# Altium PCB PCB1.PcbDoc
Units mil, origin at the board's own origin, x right, y up, seen from the top; angles counter-clockwise.
Board outline 6000 x 4000 mil, 2 copper layers (Top Layer, Bottom Layer); 1 components, 0 nets, 105 pads, 16 vias.
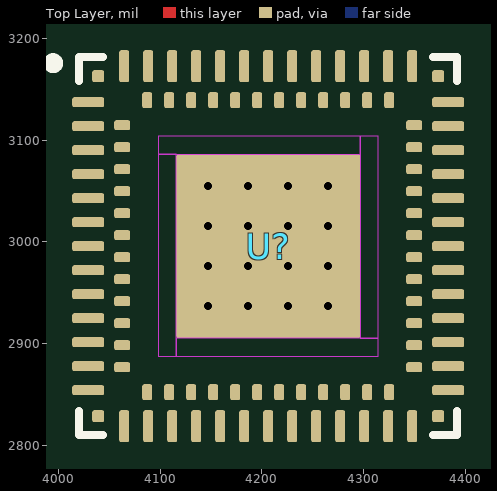
[diagram p0: Top Layer view]
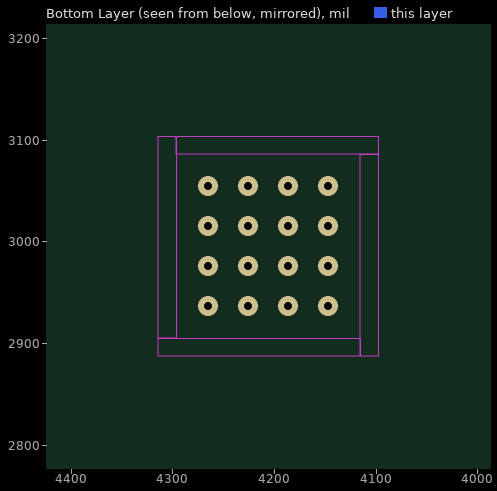
[diagram p1: Bottom Layer view, seen from below]

## Layer stack, top to bottom
Top Solder: solder mask 0.4, Solder Resist, Dk 3.5
Top Layer: signal copper 1.4
Dielectric 1: dielectric 12.6, FR-4, Dk 4.8
Bottom Layer: signal copper 1.4
Bottom Solder: solder mask 0.4, Solder Resist, Dk 3.5

## Board outline
1000,1000 7000,1000 7000,5000 1000,5000

## Design rules (kind name [scope] priority, off if disabled: settings)
Clearance [All] p1: gap=10 ignorepadtopadclearanceinfootprint=FALSE except(0: Arc-Hole Track-Hole SMDPad-Hole THPad-Hole Via-Hole Fill-Hole Poly-Hole Region-Hole Text-Hole)
PolygonConnect [All] p1: connectstyle=Relief reliefconductorwidth=10 reliefentries=4 polygonreliefangle="90 Angle" airgapwidth=10
RoutingVias [All] p1: holewidth=28 width=50 viastyle="Through Hole" minholewidth=28 minwidth=50 maxholewidth=28 maxwidth=50
SolderMaskExpansion [All] p1: expansion=4 istentingtop=FALSE
Width [All] p1: maxlimit=10 minlimit=10 preferedwidth=10
30 further rules are at their usual default settings.

## Components (designator, comment, footprint, x,y, rotation, side; value= is the part's Value field where it differs from the comment)
U? "TUSB7340IRKMR" RKM0100A_V 4206.3,2995.83 r0 top

## Footprints (in the part's own frame and the unit in brackets; to place one, negate y for a bottom-side part, rotate by r counter-clockwise, add the part's x,y. Pads: shape width x height; smd on the part's side, far side on the other; paste and mask are expansions set on the pad)
RKM0100A_V [mm] "QFN, 100-Leads, Body 9x9mm, Pitch 0.6mm, Thermal Pad 4.6x4.6mm, TI Recommended"
  rrect40% 0.8x0.25 smd paste-0.125 mask+0.07: A1(-4.5,3.6) A2(-4.5,3) A3(-4.5,2.4) A4(-4.5,1.8) A5(-4.5,1.2) A6(-4.5,0.6) A7(-4.5,0) A8(-4.5,-0.6) A9(-4.5,-1.2) A10(-4.5,-1.8) A11(-4.5,-2.4) A12(-4.5,-3) A13(-4.5,-3.6) A27(4.5,-3.6) A28(4.5,-3) A29(4.5,-2.4) A30(4.5,-1.8) A31(4.5,-1.2) A32(4.5,-0.6) A33(4.5,0) A34(4.5,0.6) A35(4.5,1.2) A36(4.5,1.8) A37(4.5,2.4) A38(4.5,3) A39(4.5,3.6)
  rrect40% 0.25x0.8 smd paste-0.125 mask+0.07: A14(-3.6,-4.5) A15(-3,-4.5) A16(-2.4,-4.5) A17(-1.8,-4.5) A18(-1.2,-4.5) A19(-0.6,-4.5) A20(0,-4.5) A21(0.6,-4.5) A22(1.2,-4.5) A23(1.8,-4.5) A24(2.4,-4.5) A25(3,-4.5) A26(3.6,-4.5) A40(3.6,4.5) A41(3,4.5) A42(2.4,4.5) A43(1.8,4.5) A44(1.2,4.5) A45(0.6,4.5) A46(0,4.5) A47(-0.6,4.5) A48(-1.2,4.5) A49(-1.8,4.5) A50(-2.4,4.5) A51(-3,4.5) A52(-3.6,4.5)
  rrect2% 4.6x4.6 smd paste-2.3: A53(0,0)
  rrect40% 0.4x0.25 smd mask+0.07: B1(-3.65,3.025) B2(-3.65,2.475) B3(-3.65,1.925) B4(-3.65,1.375) B5(-3.65,0.825) B6(-3.65,0.275) B7(-3.65,-0.275) B8(-3.65,-0.825) B9(-3.65,-1.375) B10(-3.65,-1.925) B11(-3.65,-2.475) B12(-3.65,-3.025) B25(3.65,-3.025) B26(3.65,-2.475) B27(3.65,-1.925) B28(3.65,-1.375) B29(3.65,-0.825) B30(3.65,-0.275) B31(3.65,0.275) B32(3.65,0.825) B33(3.65,1.375) B34(3.65,1.925) B35(3.65,2.475) B36(3.65,3.025)
  rrect40% 0.25x0.4 smd mask+0.07: B13(-3.025,-3.65) B14(-2.475,-3.65) B15(-1.925,-3.65) B16(-1.375,-3.65) B17(-0.825,-3.65) B18(-0.275,-3.65) B19(0.275,-3.65) B20(0.825,-3.65) B21(1.375,-3.65) B22(1.925,-3.65) B23(2.475,-3.65) B24(3.025,-3.65) B37(3.025,3.65) B38(2.475,3.65) B39(1.925,3.65) B40(1.375,3.65) B41(0.825,3.65) B42(0.275,3.65) B43(-0.275,3.65) B44(-0.825,3.65) B45(-1.375,3.65) B46(-1.925,3.65) B47(-2.475,3.65) B48(-3.025,3.65)
  rrect33% 0.3x0.3 smd mask+0.07: C1(-4.25,4.25) C2(-4.25,-4.25) C3(4.25,-4.25) C4(4.25,4.25)
  Keep-Out Layer region: -2.3,-2.3 -2.3,-2.75 2.75,-2.75 2.75,-2.3
  Keep-Out Layer region: 2.3,2.3 2.3,2.75 -2.75,2.75 -2.75,2.3
  Keep-Out Layer region: 2.3,-2.3 2.75,-2.3 2.75,2.75 2.3,2.75
  Keep-Out Layer region: -2.3,2.3 -2.75,2.3 -2.75,-2.75 -2.3,-2.75
  silkscreen extent -5.5,-4.72 4.72,4.73, body extent -4.58,-4.57 4.57,4.58, height 0.8

## Part data
U?: library part CMP-0309-00053-2, "SuperSpeed USB 4-Port xHCI Host Controller, 1.1 / 3.3V, -40 to 85 degC, 100-Pin WQFN (RKM), Green (RoHS & no Sb/Br)", Manufacturer="Texas Instruments", Supply Voltage(s)(V)="3.3, 1.1", App Proc Local Bus="x1 PCIe Gen2", ComponentLink1Description=Datasheet, ComponentLink1URL=http://www.ti.com/general/docs/lit/getliterature.tsp?genericPartNumber=TUSB7340&fileType=pdf, ComponentLink2Description="Package Specification", ComponentLink2URL=http://www.ti.com/litv/pdf/mpqf258b, DatasheetVersion=SLLSE76H, Eco-Plan="Green (RoHS & no Sb/Br)", Max# Host Ports=4, Mounting Technology="Surface Mount", PackageDescription="100-Pin Plastic Quad Flatpack No-Lead 0.6 mm Pitch", PackageReference=RKM0100A, PackageVersion="revC, Oct-2011", PartNumber=TUSB7340IRKMR, SubFamily="USB Host and On-the-Go", USB Speed=SuperSpeed

## Via types
v1: diameter 19.68, hole 7.87, Top Layer to Bottom Layer, 16 vias

## Nets (pads, with @x,y where several pads share a name; then routed paths per layer and width w, separated by ;. In a path a pad name is that pad's centre, name@x,y a point inside that pad or via, vN(x,y) a via of type N, cw(c..) or ccw(c..) an arc to the next point about the centre after c; other vN are vias at no path point)
pads on no net: U?.A1 U?.A2 U?.A3 U?.A4 U?.A5 U?.A6 U?.A7 U?.A8 U?.A9 U?.A10 U?.A11 U?.A12 U?.A13 U?.A14 U?.A15 U?.A16 U?.A17 U?.A18 U?.A19 U?.A20 U?.A21 U?.A22 U?.A23 U?.A24 U?.A25 U?.A26 U?.A27 U?.A28 U?.A29 U?.A30 U?.A31 U?.A32 U?.A33 U?.A34 U?.A35 U?.A36 U?.A37 U?.A38 U?.A39 U?.A40 U?.A41 U?.A42 U?.A43 U?.A44 U?.A45 U?.A46 U?.A47 U?.A48 U?.A49 U?.A50 U?.A51 U?.A52 U?.A53 U?.B1 U?.B2 U?.B3 U?.B4 U?.B5 U?.B6 U?.B7 U?.B8 U?.B9 U?.B10 U?.B11 U?.B12 U?.B13 U?.B14 U?.B15 U?.B16 U?.B17 U?.B18 U?.B19 U?.B20 U?.B21 U?.B22 U?.B23 U?.B24 U?.B25 U?.B26 U?.B27 U?.B28 U?.B29 U?.B30 U?.B31 U?.B32 U?.B33 U?.B34 U?.B35 U?.B36 U?.B37 U?.B38 U?.B39 U?.B40 U?.B41 U?.B42 U?.B43 U?.B44 U?.B45 U?.B46 U?.B47 U?.B48 U?.C1 U?.C2 U?.C3 U?.C4
copper on no net:
  other v1: 4147.24,2936.77 4186.61,2936.77 4225.98,2936.77 4265.35,2936.77 4147.24,2976.14 4186.61,2976.14 4225.98,2976.14 4265.35,2976.14 4147.24,3015.51 4186.61,3015.51 4225.98,3015.51 4265.35,3015.51 4147.24,3054.88 4186.61,3054.88 4225.98,3054.88 4265.35,3054.88